# Altium PCB [R0] BlackChat China Tx - BlackChat.PcbDoc
Units mil, origin at the board's own origin, x right, y up, seen from the top; angles counter-clockwise.
Board outline 825 x 975 mil, 2 copper layers (Top Layer, Bottom Layer); 10 components, 9 nets, 24 pads, 12 vias.
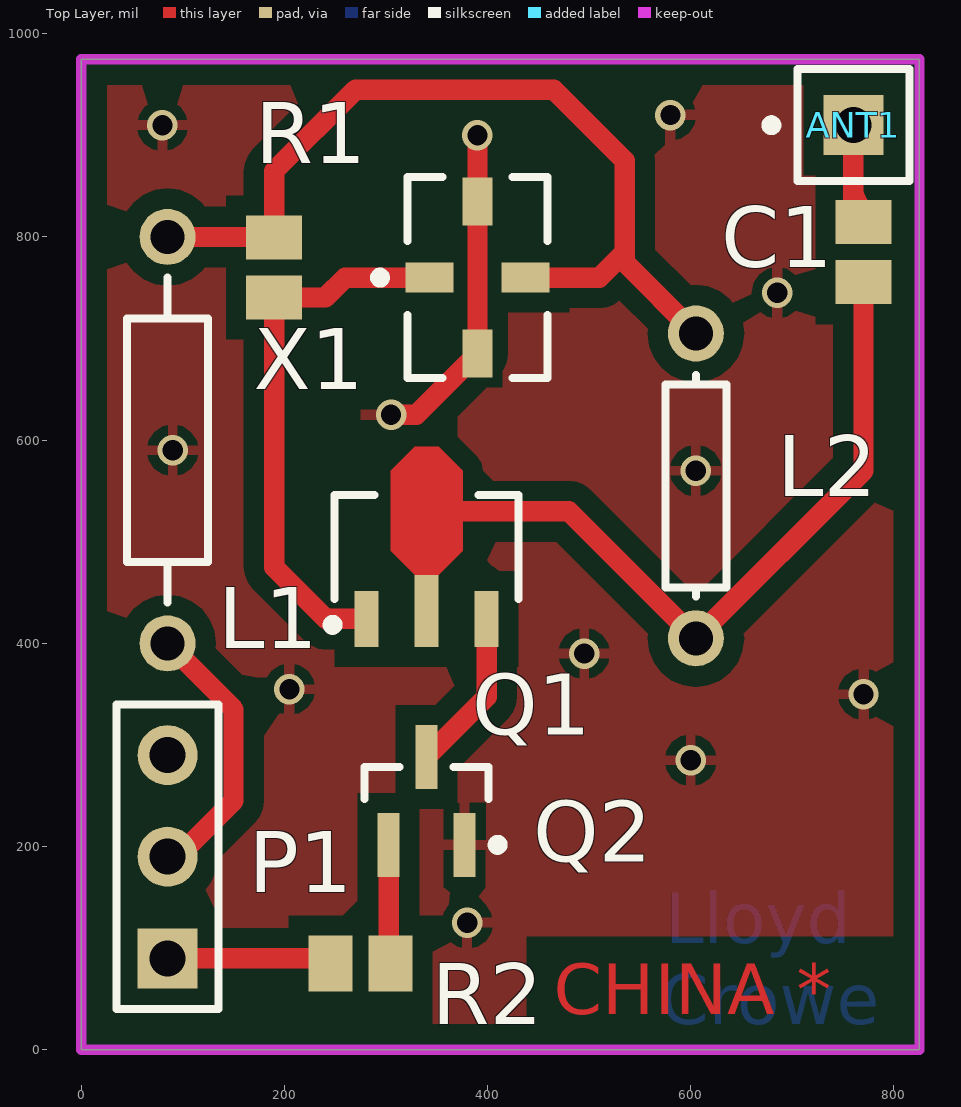
[diagram p0: Top Layer view]
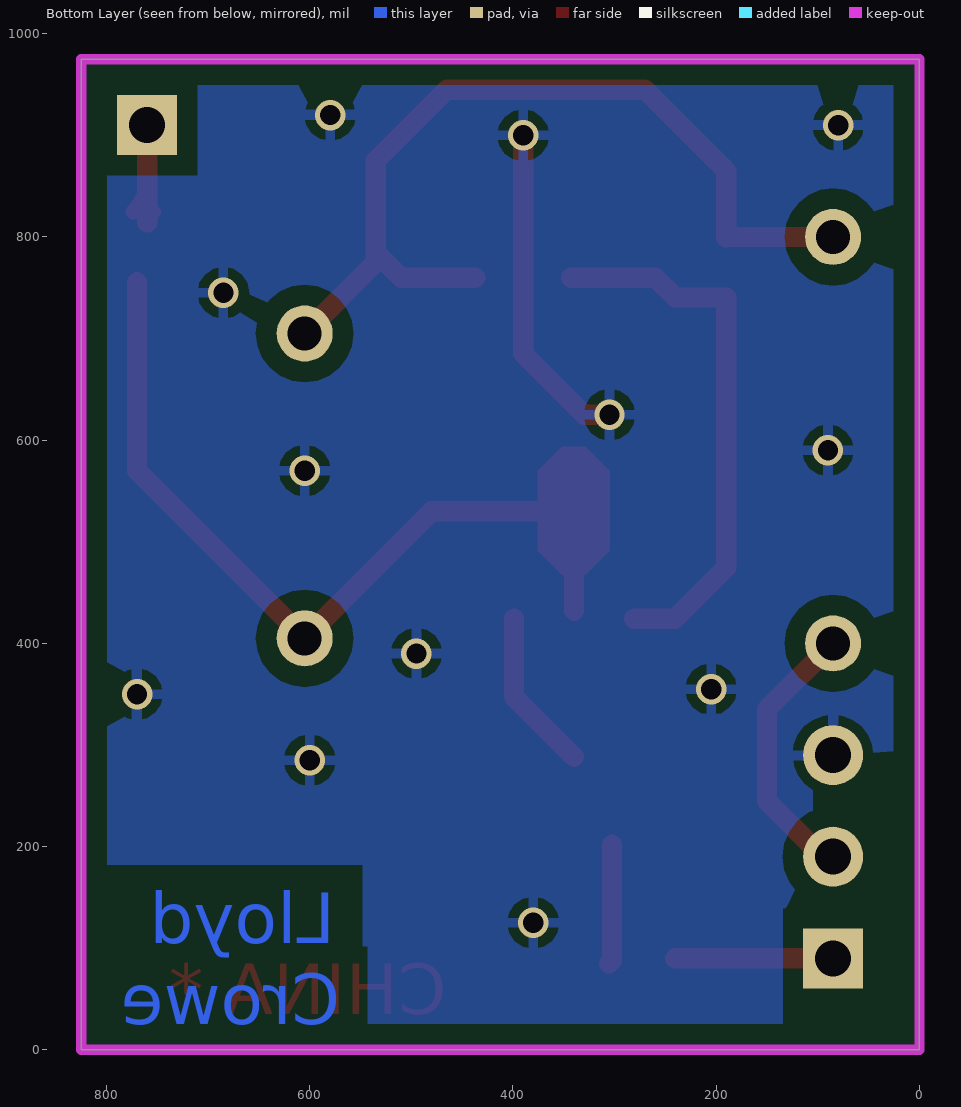
[diagram p1: Bottom Layer view, seen from below]

## Layer stack, top to bottom
Top Layer: signal copper 1.4
Dielectric: dielectric 12.6, FR-4, Dk 4.8
Bottom Layer: signal copper 1.4

## Board outline
0,0 825,0 825,975 0,975

## Design rules (kind name [scope] priority, off if disabled: settings)
Clearance [InPolygon] p1: gap=20
Clearance Clearance_1 [All] p2: gap=10
PolygonConnect [All] p1: connectstyle=Relief reliefconductorwidth=10 reliefentries=4 polygonreliefangle="90 Angle" airgapwidth=10
RoutingVias [All] p1: holewidth=28 width=50 viastyle="Through Hole" minholewidth=28 minwidth=50 maxholewidth=28 maxwidth=50
SolderMaskExpansion [All] p1: expansion=4
Width [All] p1: maxlimit=100 minlimit=5 preferedwidth=10 minimp=50.000000 maximp=50.000000 favimp=50.000000
28 further rules are at their usual default settings.

## Components (designator, comment, footprint, x,y, rotation, side; value= is the part's Value field where it differs from the comment)
ANT1 "Plug" PIN1 760,910 r90 top
C1 "7pF" CAP-0805 770,785 r90 top
L1 "7.5 Turns" AXIAL-0.4 85,600 r270 top
L2 "2.5 Turns" AXIAL-0.3 605,555 r90 top
P1 "Header 3" HDR1X3 85,90 r90 top
Q1 "NE85634" NE85634_SOT89 340,495 r90 top
Q2 "MMSS8050" SOT95P275X120-3N 340,245 r90 top
R1 "2.7K" RES-0805 190,770 r270 top
R2 "2.7K" RES-0805 275,85 r0 top
X1 "RO3101A" RO3101A 390,760 r0 top

## Footprints (in the part's own frame and the unit in brackets; to place one, negate y for a bottom-side part, rotate by r counter-clockwise, add the part's x,y. Pads: shape width x height; smd on the part's side, far side on the other; paste and mask are expansions set on the pad)
AXIAL-0.3 [mm] "Axial Device, Thru-Hole; 2 Leads; 0.3 in Pin Spacing"
  round 1.4 hole 0.85: 1(-3.81,0) 2(3.81,0)
  silkscreen extent -2.77,-0.76 2.77,0.76
AXIAL-0.4 [mm] "Axial Device, Thru-Hole; 2 Leads; 0.4 in Pin Spacing"
  round 1.4 hole 0.85: 1(-5.08,0) 2(5.08,0)
  silkscreen extent -4.06,-1.02 4.06,1.02
CAP-0805 [mm] "Chip Capacitor, Body 2.0x1.3mm, IPC High Density"
  rect 1.1x1.4 smd: 1(-0.75,0) 2(0.75,0)
  body extent -1.1,-0.72 1.1,0.72, height 1.4
HDR1X3 [mm] "Connector; Header; 3 Position"
  rect 1.5x1.5 hole 0.9: 1(0,0)
  round 1.5 hole 0.9: 2(2.54,0) 3(5.08,0)
  silkscreen extent -1.27,-1.27 6.35,1.27
NE85634_SOT89 [mm] "SOT89, 3-Leads, Body 4.50x2.50mm, Pitch 1.50mm, Lead Span 4.0mm, IPC Medium Density"
  rect 1.4x0.6 smd: 1(-1.8,1.5) 3(-1.8,-1.5)
  rect 1.8x0.6 smd: 2(-1.6,0)
  Top Layer region: -0.7,0.3 -0.1,0.9 1.9,0.9 2.5,0.3 2.5,-0.3 1.9,-0.9 -0.1,-0.9 -0.7,-0.3
  silkscreen extent -2.07,-2.3 1.3,2.47, body extent -1.3,-2.3 1.3,2.3, height 1.6
PIN1 [mm] "Connector; Plug"
  rect 1.5x1.5 hole 0.9: 1(0,0)
  silkscreen extent -1.4,-1.4 1.4,2.17
RES-0805 [mm] "Chip Resistor, Body 2.0x1.3mm, IPC High Density"
  rect 1.1x1.4 smd: 1(-0.75,0) 2(0.75,0)
  body extent -1.1,-0.72 1.1,0.72, height 1.4
RO3101A [mm] "433.92 MHz  SAW  Resonator"
  rect 1.2x0.75 smd: 1(-1.2,0) 3(1.2,0)
  rect 0.75x1.2 smd: 2(0,-1.9) 4(0,1.9)
  silkscreen extent -2.56,-2.51 1.75,2.51, body extent -1.7,-2.49 1.8,2.57, height 1.25
SOT95P275X120-3N [mm] "SOT23, 3-Leads, Body 2.90x2.75mm, Pitch 0.95mm, IPC Medium Density"
  rect 1.6x0.55 smd: 1(-1.1,-0.95) 2(-1.1,0.95) 3(1.1,0)
  silkscreen extent -1.22,-1.9 0.85,1.55, body extent -0.85,-1.55 0.85,1.55, height 1.2

## Part data
C1: library part CHIP-CAP, "SMD Chip Capacitor"
L1 L2: library part Inductor, "Generic Inductor"
P1: "Header, 3-Pin"
Q1: "NPN RF SILICON TRANSISTOR"
Q2: "NPN SILICON TRANSISTOR"
R1 R2: library part CHIP-RES, "SMD Chip Resistor"
X1: "433.92 MHz  SAW  Resonator"

## Via types
v1: diameter 30, hole 20, Top Layer to Bottom Layer, 12 vias

## Nets (pads, with @x,y where several pads share a name; then routed paths per layer and width w, separated by ;. In a path a pad name is that pad's centre, name@x,y a point inside that pad or via, vN(x,y) a via of type N, cw(c..) or ccw(c..) an arc to the next point about the centre after c; other vN are vias at no path point)
AGND: P1.3 Q2.1 X1.2 X1.4 | length 324.7
  Top Layer w20: v1(305,625) 329.8,625 X1.2 X1.4 v1(390,900)
  other v1: 380,125 600,285 770,350 205,355 495,390 605,570 90,590 685,745 80,910 580,920
AVCC: L1.2 P1.2 | length 269.7
  Top Layer w20: P1.2 95,190 150,245 150,335 L1.2
DATA: P1.1 R2.1 | length 155.5
  Top Layer w20: P1.1 R2.1@240.47,90
NetANT1_1: ANT1.1 C1.2 | length 149.1
  Top Layer w15: C1.2@754.09,824.54 ccw(c739.81,838.81) 760,838.81 ; 760,858.58 ccw(c808.15,858.58) C1.2@774.1,824.54
  Top Layer w20: C1.2@760,814.53 ANT1.1
NetC1_1: C1.1 L2.1 Q1.2 | length 833.6
  Top Layer w20: Q1.2 340,530 480,530 L2.1 770,570 C1.1
NetL1_1: L1.1 L2.2 R1.1 X1.3 | length 884.2
  Top Layer w20: L1.1 R1.1@189.53,800 ; R1.1 190,865 270,945 465,945 535,875 535,775 L2.2 ; X1.3 510,760 535,785
NetQ1_1: Q1.1 R1.2 X1.1 | length 538.3
  Top Layer w20: Q1.1 240.87,424.13 190,475 R1.2 240.47,740.47 260,760 X1.1
NetQ1_3: Q1.3 Q2.3 | length 160.3
  Top Layer w20: Q2.3 399.06,347.36 Q1.3
NetQ2_2: Q2.2 R2.2 | length 117.9
  Top Layer w20: Q2.2 302.6,87.87 R2.2@305.47,85

## Polygon pours and split planes (outlines as drawn)
AGND on Top Layer "Ground" (solid, remove dead copper, pour order 4): 0,0 825,0 825,975 0,975
AGND on Bottom Layer "Ground" (solid, remove dead copper, pour order 3): 0,0 825,0 825,975 0,975

## Keep-outs
Keep-Out Layer:
  the board outline again, w10

## Other copper
Top Layer:
  text "CHINA *" at 465,35 h50
Bottom Layer:
  text "Lloyd" at 575,105 h50
  text "Crowe" at 570,25 h50